# EAGLE board projeto_jcarlos (EAGLE 6.2)
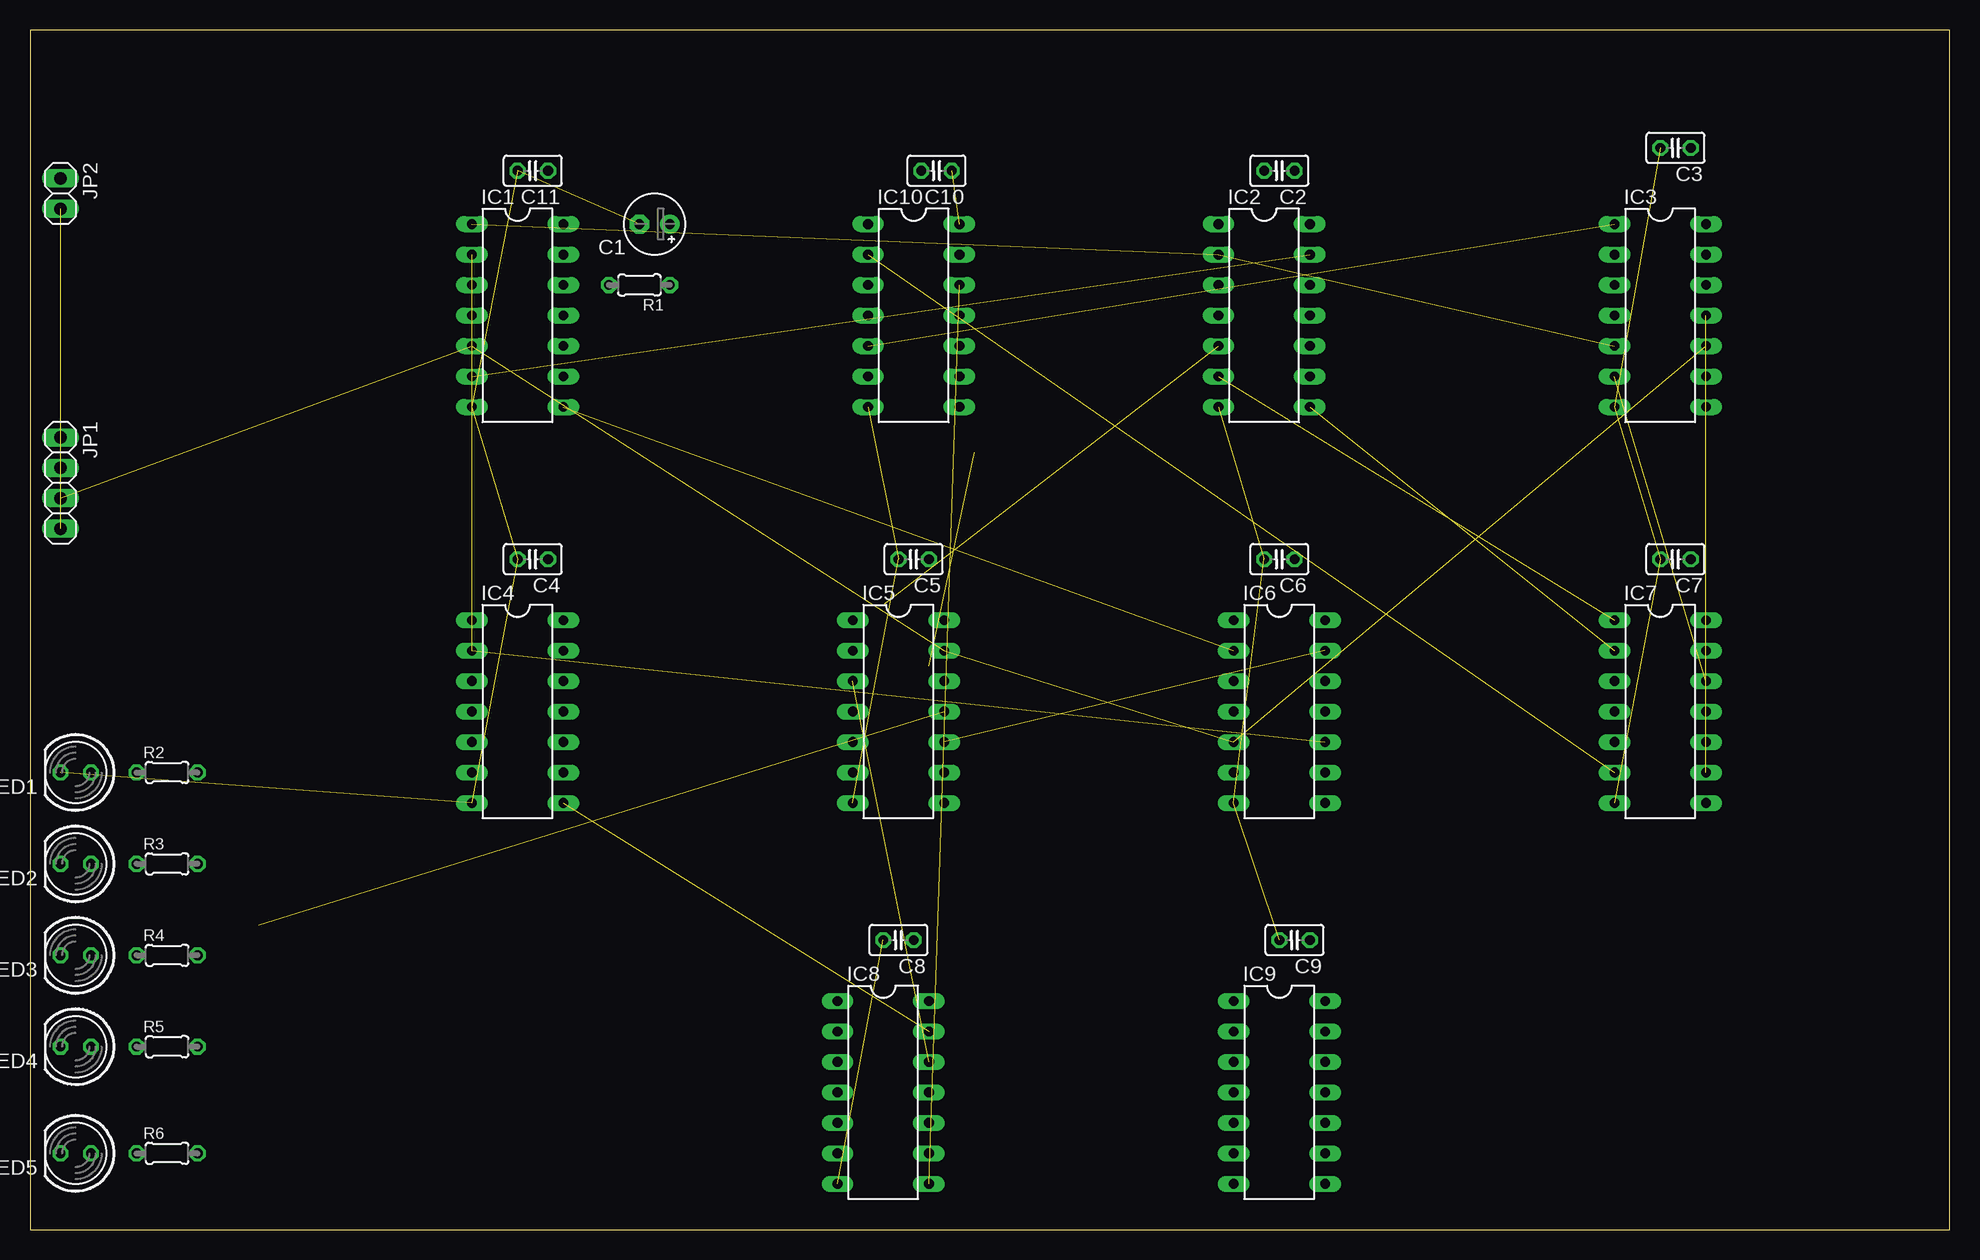
[diagram p0: board, top side]
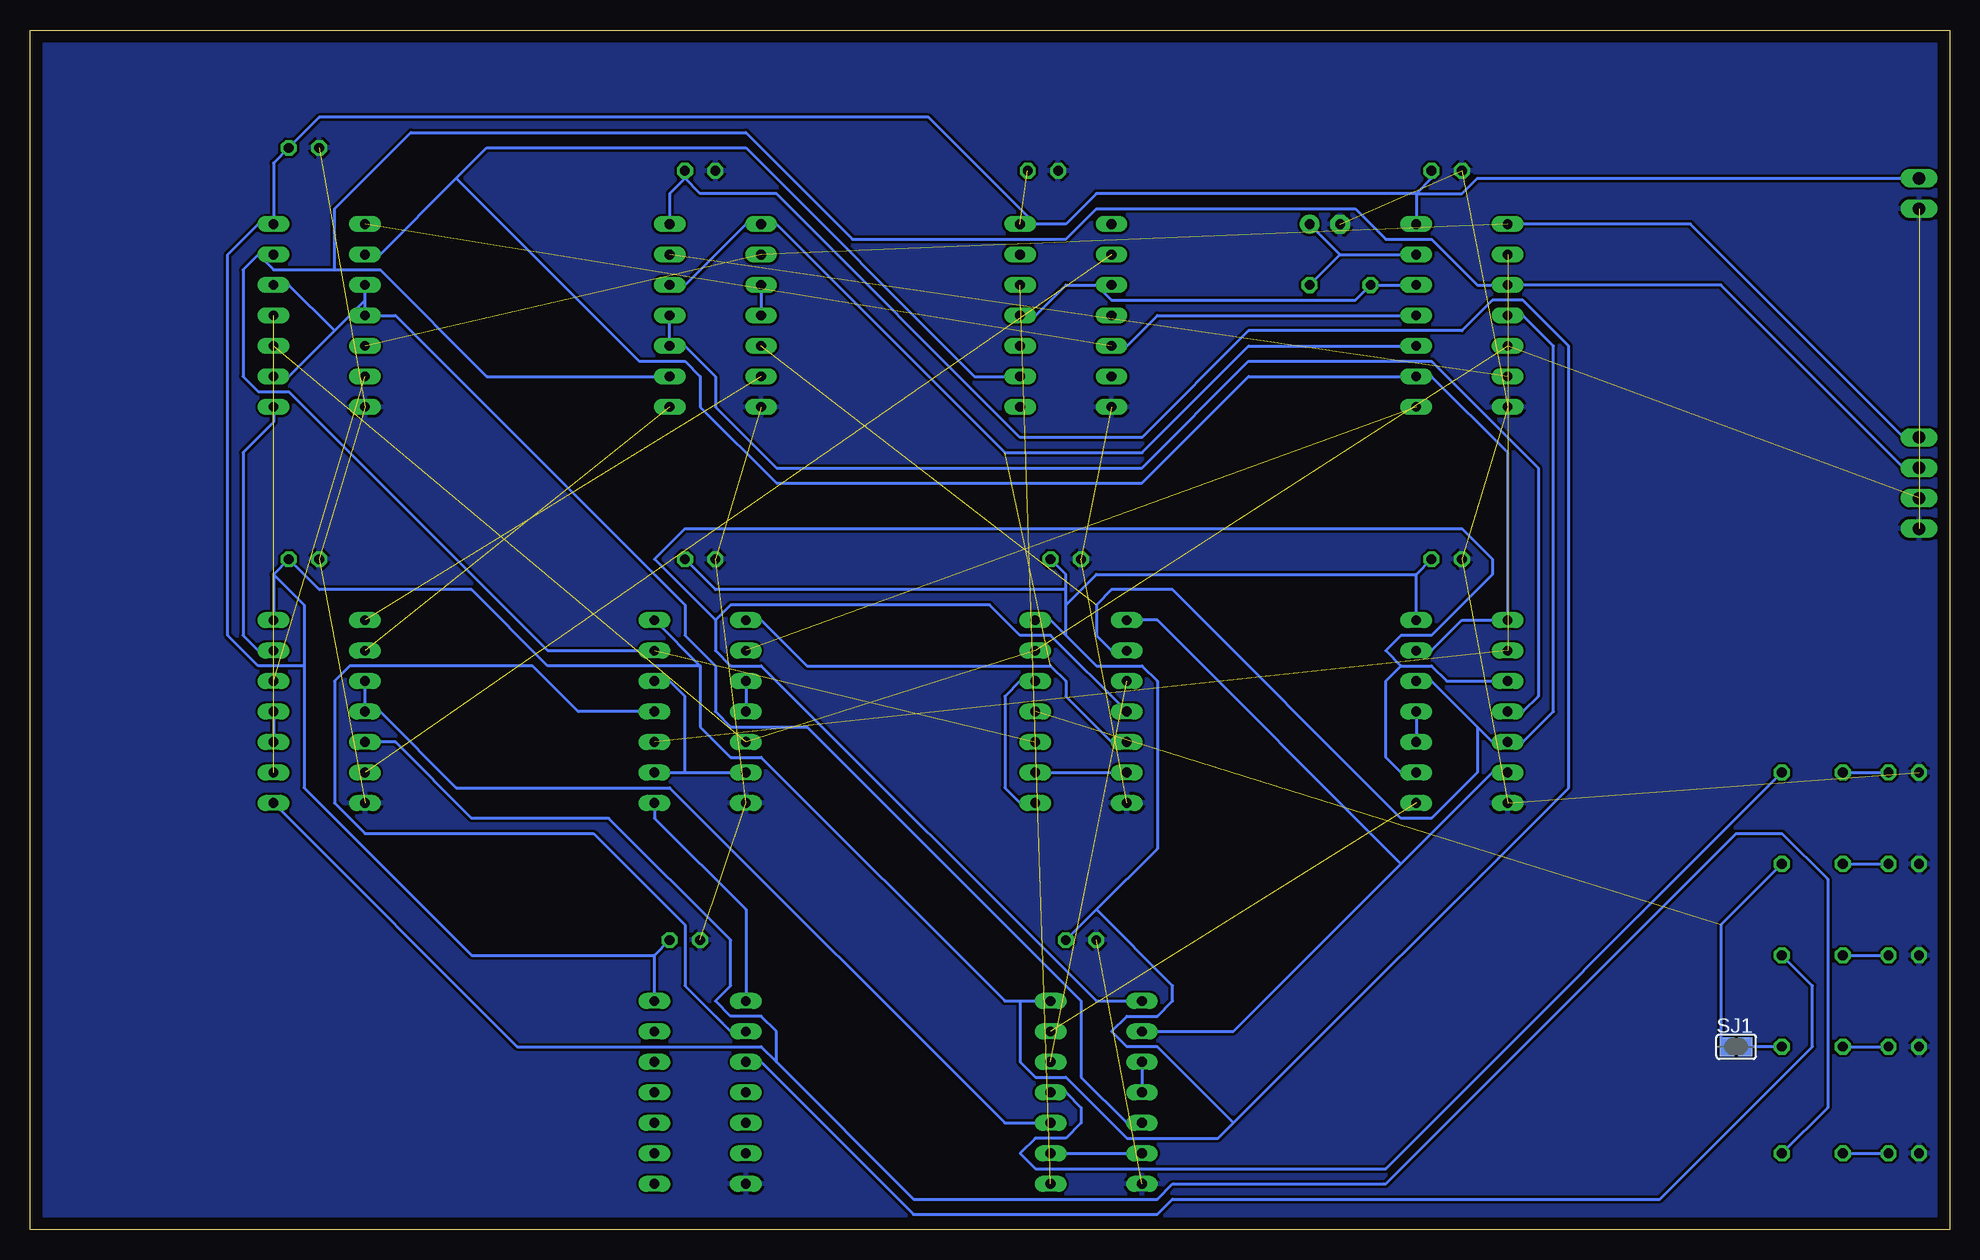
[diagram p1: board, bottom side, seen from below]

Size 160 x 100 mm. Coordinates in mm from the lower left corner, seen from the top.
Outline: 0,0 160,0 160,100 0,100 0,0
Copper layers (1*16): Top 0.035mm / dielectric 1.5mm / Bottom 0.035mm
Design rules: minimum track width 10mil, minimum drill 24mil, track to track 8mil, track to pad 8mil, pad to pad 8mil, via to via 8mil, smd to smd 8mil, copper to edge 40mil, drill to drill 8mil, minimum pad ring 10mil, minimum via ring 8mil, stop-mask expansion 4mil, vias tented up to drill 0mil, thermal gap 10mil

## Footprints (pad centres in the part's own frame; a part is rotated, then mirrored left to right if it is on the bottom)
E2,5-5 = drill 0.813 pad 1.6: + -1.27,0 | drill 0.813 pad 1.6 octagon: - 1.27,0
C025-025X050 = drill 0.813 octagon: 1 -1.27,0; 2 1.27,0
DIL14 = drill 0.813 long: 1 -7.62,-3.81; 2 -5.08,-3.81; 3 -2.54,-3.81; 4 0,-3.81; 5 2.54,-3.81; 6 5.08,-3.81; 7 7.62,-3.81; 8 7.62,3.81; 9 5.08,3.81; 10 2.54,3.81; 11 0,3.81; 12 -2.54,3.81; 13 -5.08,3.81; 14 -7.62,3.81
1X04 = drill 1.016 long: 1 -3.81,0; 2 -1.27,0; 3 1.27,0; 4 3.81,0
1X02 = drill 1.016 long: 1 -1.27,0; 2 1.27,0
LED5MM = drill 0.813 octagon: A -1.27,0; K 1.27,0
0204/5 = drill 0.813 octagon: 1 -2.54,0; 2 2.54,0
SJ = smd 1.168 x 1.6: 1 -0.762,0; 2 0.762,0

## Placement (x,y rotation side)
C1  1uF  [E2,5-5]  52.07,83.82 180 top
C2  0,1uF  [C025-025X050]  104.14,88.27 180 top
C3  0,1uF  [C025-025X050]  137.16,90.17 180 top
C4  0,1uF  [C025-025X050]  41.91,55.88 180 top
C5  0,1uF  [C025-025X050]  73.66,55.88 180 top
C6  0,1uF  [C025-025X050]  104.14,55.88 180 top
C7  0,1uF  [C025-025X050]  137.16,55.88 180 top
C8  0,1uF  [C025-025X050]  72.39,24.13 180 top
C9  0,1uF  [C025-025X050]  105.41,24.13 180 top
C10  0,1uF  [C025-025X050]  75.56,88.27 180 top
C11  0,1uF  [C025-025X050]  41.91,88.27 180 top
IC1  74HCT14N  [DIL14]  40.64,76.2 270 top
IC2  74HC08N  [DIL14]  102.87,76.2 270 top
IC3  74HC08N  [DIL14]  135.89,76.2 270 top
IC4  74HC08N  [DIL14]  40.64,43.18 270 top
IC5  74HC08N  [DIL14]  72.39,43.18 270 top
IC6  74HC08N  [DIL14]  104.14,43.18 270 top
IC7  7432N  [DIL14]  135.89,43.18 270 top
IC8  7432N  [DIL14]  71.12,11.43 270 top
IC9  7432N  [DIL14]  104.14,11.43 270 top
IC10  74S74N  [DIL14]  73.66,76.2 270 top
JP1  [1X04]  2.54,62.23 270 top
JP2  [1X02]  2.54,86.36 270 top
LED1  [LED5MM]  3.81,38.1 180 top
LED2  [LED5MM]  3.81,30.48 180 top
LED3  [LED5MM]  3.81,22.86 180 top
LED4  [LED5MM]  3.81,15.24 180 top
LED5  [LED5MM]  3.81,6.35 180 top
R1  680R  [0204/5]  50.8,78.74 180 top
R2  330R  [0204/5]  11.43,38.1 0 top
R3  330R  [0204/5]  11.43,30.48 0 top
R4  330R  [0204/5]  11.43,22.86 0 top
R5  330R  [0204/5]  11.43,15.24 0 top
R6  330R  [0204/5]  11.43,6.35 0 top
SJ1  [SJ]  17.78,15.24 0 bottom

## Library data of the parts
C1-C11 R1-R6 = rcl
IC1-IC6 = 74xx-eu
IC7-IC10 = 74xx-us
JP1 JP2 = pinhead
LED1-LED5 = led
SJ1 = jumper

## Nets
!E0-: IC1.8 IC6.2
!E1-: IC1.10 IC2.1 IC2.12 IC5.5 IC6.1
!SC: IC1.2 IC4.2 IC6.10
!SM: IC1.4 IC2.5 IC4.5 IC4.12 IC5.2
!SV: IC1.6 IC2.13
+5V: C2.1 C3.1 C4.1 C5.1 C6.1 C7.1 C8.1 C9.1 C10.1 C11.1 IC1.14 IC2.14 IC3.14 IC4.14 IC5.14 IC6.14 IC7.14 IC8.14 IC9.14 IC10.14 JP2.1
A0: IC2.10 IC2.11 IC4.4
A1: IC3.3 IC3.4 IC3.9 IC3.12 IC8.5
AL: IC7.5 IC7.8 R6.2
E0+: IC8.8 IC10.12
E0-: IC1.9 IC3.2 IC4.1 IC4.13 IC10.9
E1+: IC7.6 IC10.2
E1-: IC1.11 IC3.1 IC10.5
GND: C1.- C2.2 C3.2 C4.2 C5.2 C6.2 C7.2 C8.2 C9.2 C10.2 C11.2 IC1.7 IC2.7 IC3.7 IC4.7 IC5.7 IC6.7 IC7.7 IC8.7 IC9.7 IC10.7 JP1.4 JP2.2 LED1.K LED2.K LED3.K LED4.K LED5.K
MA: R5.2 SJ1.2
N$1: IC5.6 IC5.9
N$2: IC7.3 IC7.4 IC8.10
N$3: IC4.10 IC4.11
N$4: IC4.8 IC8.13
N$5: IC8.3 IC8.4
N$6: IC5.3 IC8.12
N$7: C1.+ IC1.13 R1.1
N$8: IC1.12 IC10.3 IC10.11 R1.2
N$9: IC8.6 IC8.9
N$10: IC4.3 IC4.9 IC5.4 IC8.1
N$11: IC5.8 IC5.12
N$12: IC4.6 IC5.1 IC8.2
N$13: IC2.3 IC2.4
N$14: LED1.A R2.1
N$15: IC2.6 IC7.1
N$16: LED2.A R3.1
N$17: LED3.A R4.1
N$18: IC2.8 IC7.2
N$19: IC3.6 IC7.12
N$20: IC3.8 IC7.13
N$21: IC3.11 IC7.9
N$22: IC7.10 IC7.11
N$23: LED4.A R5.1
N$24: LED5.A R6.1
N$27: IC6.3 IC6.4
N$29: IC6.6 IC6.9 IC6.12
N$32: IC6.8 IC9.1
N$33: IC6.11 IC9.2
SC: IC1.1 IC2.2 IC3.5 JP1.1
SM: IC1.3 IC2.9 IC3.13 IC5.10 IC6.13 JP1.2
SV: IC1.5 IC3.10 IC5.13 IC6.5 JP1.3
VA: IC8.11 R2.2
VB: IC5.11 R3.2 SJ1.1
VC: IC9.3 R4.2

## Tracks (layer width: path | path; a pad name or v marks a point on that pad's centre or on a via)
!E0-  (1 unrouted)
!E1-  (1 unrouted)
  Bottom 0.254: IC1.10 58.42,73.66 67.31,64.77 78.74,64.77 97.79,83.82 IC2.1 100.33,83.82 105.41,78.74 IC2.12 | IC5.5 69.85,40.64 73.66,44.45 73.66,45.72 74.93,46.99 95.25,46.99 99.06,50.8 IC6.1
!SC  (2 unrouted)
!SM  (1 unrouted)
  Bottom 0.254: 39.37,41.91 43.18,45.72 IC4.12 | 39.37,41.91 38.1,40.64 IC4.5 35.56,40.64 33.02,43.18 33.02,73.66 35.56,76.2 IC1.4 | IC5.2 69.85,48.26 71.12,49.53 71.12,52.07 69.85,53.34 64.77,53.34 45.72,34.29 43.18,34.29 39.37,38.1 39.37,41.91
!SV  (1 unrouted)
+5V  (1 unrouted)
  Bottom 0.254: 44.45,86.36 IC1.14 | 44.45,86.36 43.18,87.63 C11.1 | 76.2,83.82 73.66,83.82 71.12,86.36 44.45,86.36 | JP2.1 39.37,87.63 40.64,86.36 44.45,86.36 | 76.2,83.82 85.09,92.71 135.89,92.71 C3.1 139.7,88.9 IC3.14 140.97,83.82 143.51,81.28 143.51,49.53 140.97,46.99 137.16,46.99 | 76.2,83.82 IC10.14 | 44.45,54.61 C4.1 | IC4.14 44.45,54.61 | 71.12,26.67 66.04,31.75 66.04,45.72 67.31,46.99 71.12,46.99 73.66,49.53 | 71.12,26.67 C8.1 | 73.66,49.53 74.93,50.8 IC5.14 | C5.1 73.66,54.61 73.66,53.34 | 73.66,49.53 73.66,52.07 | 73.66,52.07 73.66,53.34 | C6.1 102.87,53.34 73.66,53.34 | 44.45,54.61 71.12,54.61 73.66,52.07 | 107.95,22.86 C9.1 | IC9.14 107.95,22.86 | 139.7,54.61 IC7.14 | 139.7,54.61 C7.1 135.89,53.34 123.19,53.34 116.84,46.99 104.14,46.99 | 107.95,22.86 123.19,22.86 137.16,36.83 137.16,46.99 | 137.16,46.99 137.16,52.07 139.7,54.61 | IC2.14 106.68,86.36 105.41,87.63 | 77.47,19.05 78.74,19.05 99.06,39.37 101.6,39.37 104.14,41.91 104.14,46.99 | 77.47,19.05 IC8.14 | IC6.14 104.14,46.99 | 105.41,87.63 104.14,86.36 97.79,86.36 77.47,66.04 67.31,66.04 58.42,74.93 40.64,74.93 38.1,77.47 35.56,77.47 31.75,73.66 31.75,36.83 59.69,8.89 | 59.69,8.89 60.96,7.62 68.58,7.62 73.66,12.7 76.2,12.7 77.47,13.97 77.47,19.05 | 105.41,87.63 C2.1 | 71.12,26.67 64.77,20.32 64.77,19.05 66.04,17.78 68.58,17.78 69.85,16.51 68.58,15.24 66.04,15.24 59.69,8.89
A0
  Bottom 0.254: IC4.4 35.56,43.18 34.29,44.45 34.29,63.5 43.18,72.39 58.42,72.39 67.31,63.5 97.79,63.5 102.87,68.58 102.87,71.12 105.41,73.66 IC2.10 IC2.11
A1
  Bottom 0.254: IC8.5 68.58,8.89 72.39,12.7 72.39,19.05 95.25,41.91 101.6,41.91 102.87,43.18 102.87,46.99 105.41,49.53 105.41,52.07 129.54,76.2 IC3.4 132.08,77.47 | 132.08,77.47 IC3.3 | IC3.9 138.43,71.12 134.62,74.93 | 132.08,77.47 134.62,74.93 | IC3.12 138.43,78.74 134.62,74.93
AL
  Bottom 0.254: R6.2 10.16,10.16 10.16,29.21 13.97,33.02 17.78,33.02 46.99,3.81 64.77,3.81 66.04,2.54 86.36,2.54 97.79,13.97 | 97.79,13.97 99.06,15.24 119.38,15.24 IC7.8 | IC7.5 129.54,40.64 123.19,34.29 111.76,34.29 101.6,24.13 101.6,20.32 102.87,19.05 101.6,17.78 99.06,17.78 97.79,16.51 97.79,13.97
E0+  (1 unrouted)
E0-
  Bottom 0.254: IC4.13 43.18,48.26 40.64,50.8 IC4.1 36.83,64.77 43.18,71.12 IC1.9 58.42,71.12 67.31,62.23 97.79,62.23 104.14,68.58 104.14,71.12 105.41,72.39 109.22,72.39 124.46,87.63 | IC10.9 81.28,71.12 100.33,90.17 121.92,90.17 124.46,87.63 | 124.46,87.63 130.81,81.28 IC3.2
E1+  (1 unrouted)
E1-  (1 unrouted)
  Bottom 0.254: IC1.11 66.04,76.2 68.58,73.66 IC10.5
GND  (15 unrouted)
  pour Bottom: 0,100.97 161.29,100.97 161.29,-1.27 -1.27,-1.27 -1.27,100.97
MA
  Bottom 0.254: R5.2 SJ1.2
N$1
  Bottom 0.254: IC5.9 IC5.6
N$2
  Bottom 0.254: IC8.10 78.74,8.89 106.68,36.83 124.46,36.83 130.81,43.18 IC7.4 IC7.3
N$3
  Bottom 0.254: IC4.11 IC4.10
N$4  (1 unrouted)
N$5
  Bottom 0.254: IC8.3 IC8.4
N$6  (1 unrouted)
N$7
  Bottom 0.254: 50.8,81.28 IC1.13 | R1.1 50.8,81.28 | 50.8,81.28 C1.+
N$8
  Bottom 0.254: IC1.12 R1.2 49.53,77.47 69.85,77.47 71.12,78.74 | 71.12,78.74 73.66,78.74 76.2,76.2 IC10.11 | 71.12,78.74 IC10.3
N$9
  Bottom 0.254: IC8.9 IC8.6
N$10
  Bottom 0.254: IC4.3 41.91,45.72 43.18,46.99 45.72,46.99 | 45.72,46.99 46.99,45.72 46.99,39.37 45.72,38.1 IC4.9 | IC8.1 71.12,19.05 99.06,46.99 101.6,46.99 102.87,48.26 102.87,50.8 | 102.87,50.8 101.6,52.07 80.01,52.07 77.47,49.53 74.93,49.53 IC5.4 | 45.72,46.99 46.99,48.26 45.72,49.53 43.18,49.53 38.1,54.61 38.1,55.88 40.64,58.42 105.41,58.42 107.95,55.88 102.87,50.8
N$11
  Bottom 0.254: IC5.8 77.47,35.56 78.74,36.83 78.74,44.45 77.47,45.72 IC5.12
N$12
  Bottom 0.254: IC4.6 38.1,38.1 45.72,30.48 | 45.72,30.48 59.69,16.51 IC8.2 | IC5.1 66.04,50.8 45.72,30.48
N$13
  Bottom 0.254: IC2.3 IC2.4
N$14
  Bottom 0.254: R2.1 LED1.A
N$15  (1 unrouted)
N$16
  Bottom 0.254: R3.1 LED2.A
N$17
  Bottom 0.254: R4.1 LED3.A
N$18  (1 unrouted)
N$19  (1 unrouted)
N$20
  Bottom 0.254: IC7.13 140.97,48.26 142.24,49.53 142.24,64.77 139.7,67.31 IC3.8
N$21  (1 unrouted)
N$22
  Bottom 0.254: IC7.11 IC7.10
N$23
  Bottom 0.254: R5.1 LED4.A
N$24
  Bottom 0.254: R6.1 LED5.A
N$27
  Bottom 0.254: IC6.3 IC6.4
N$29
  Bottom 0.254: IC6.9 105.41,38.1 | 105.41,38.1 IC6.6 | IC6.12 106.68,45.72 105.41,44.45 105.41,38.1
N$32
  Bottom 0.254: IC9.1 100.33,26.67 107.95,34.29 IC6.8
N$33
  Bottom 0.254: IC9.2 101.6,16.51 105.41,20.32 105.41,25.4 113.03,33.02 132.08,33.02 134.62,35.56 134.62,45.72 133.35,46.99 118.11,46.99 114.3,43.18 IC6.11
SC  (2 unrouted)
  Bottom 0.254: IC1.1 21.59,83.82 3.81,66.04 JP1.1
SM  (1 unrouted)
  Bottom 0.254: JP1.2 3.81,63.5 19.05,78.74 IC1.3 39.37,78.74 43.18,82.55 46.99,82.55 49.53,85.09 71.12,85.09 73.66,82.55 91.44,82.55 100.33,91.44 128.27,91.44 134.62,85.09 134.62,80.01 | IC6.13 116.84,48.26 138.43,69.85 140.97,69.85 142.24,71.12 142.24,80.01 140.97,81.28 | IC2.9 121.92,71.12 130.81,80.01 134.62,80.01 | 134.62,80.01 139.7,80.01 140.97,81.28 | 140.97,81.28 IC3.13
SV  (4 unrouted)
VA
  Bottom 0.254: R2.2 46.99,5.08 76.2,5.08 77.47,6.35 76.2,7.62 73.66,7.62 72.39,8.89 72.39,10.16 73.66,11.43 IC8.11
VB  (1 unrouted)
  Bottom 0.254: R3.2 19.05,25.4 19.05,15.24 SJ1.1
VC
  Bottom 0.254: R4.2 11.43,20.32 11.43,15.24 24.13,2.54 64.77,2.54 66.04,1.27 86.36,1.27 99.06,13.97 IC9.3